# Altium PCB CarrierBoard.PcbDoc (part 2 of 2)
Units mm, origin at the board's own origin, x right, y up, seen from the top; angles counter-clockwise.
Board outline 96.12 x 102.87 mm, 2 copper layers (Top Layer, Bottom Layer), stack 1.6 mm thick; 58 components, 54 nets, 251 pads, 78 vias.
Unrouted connection lines stored in the file: 2.
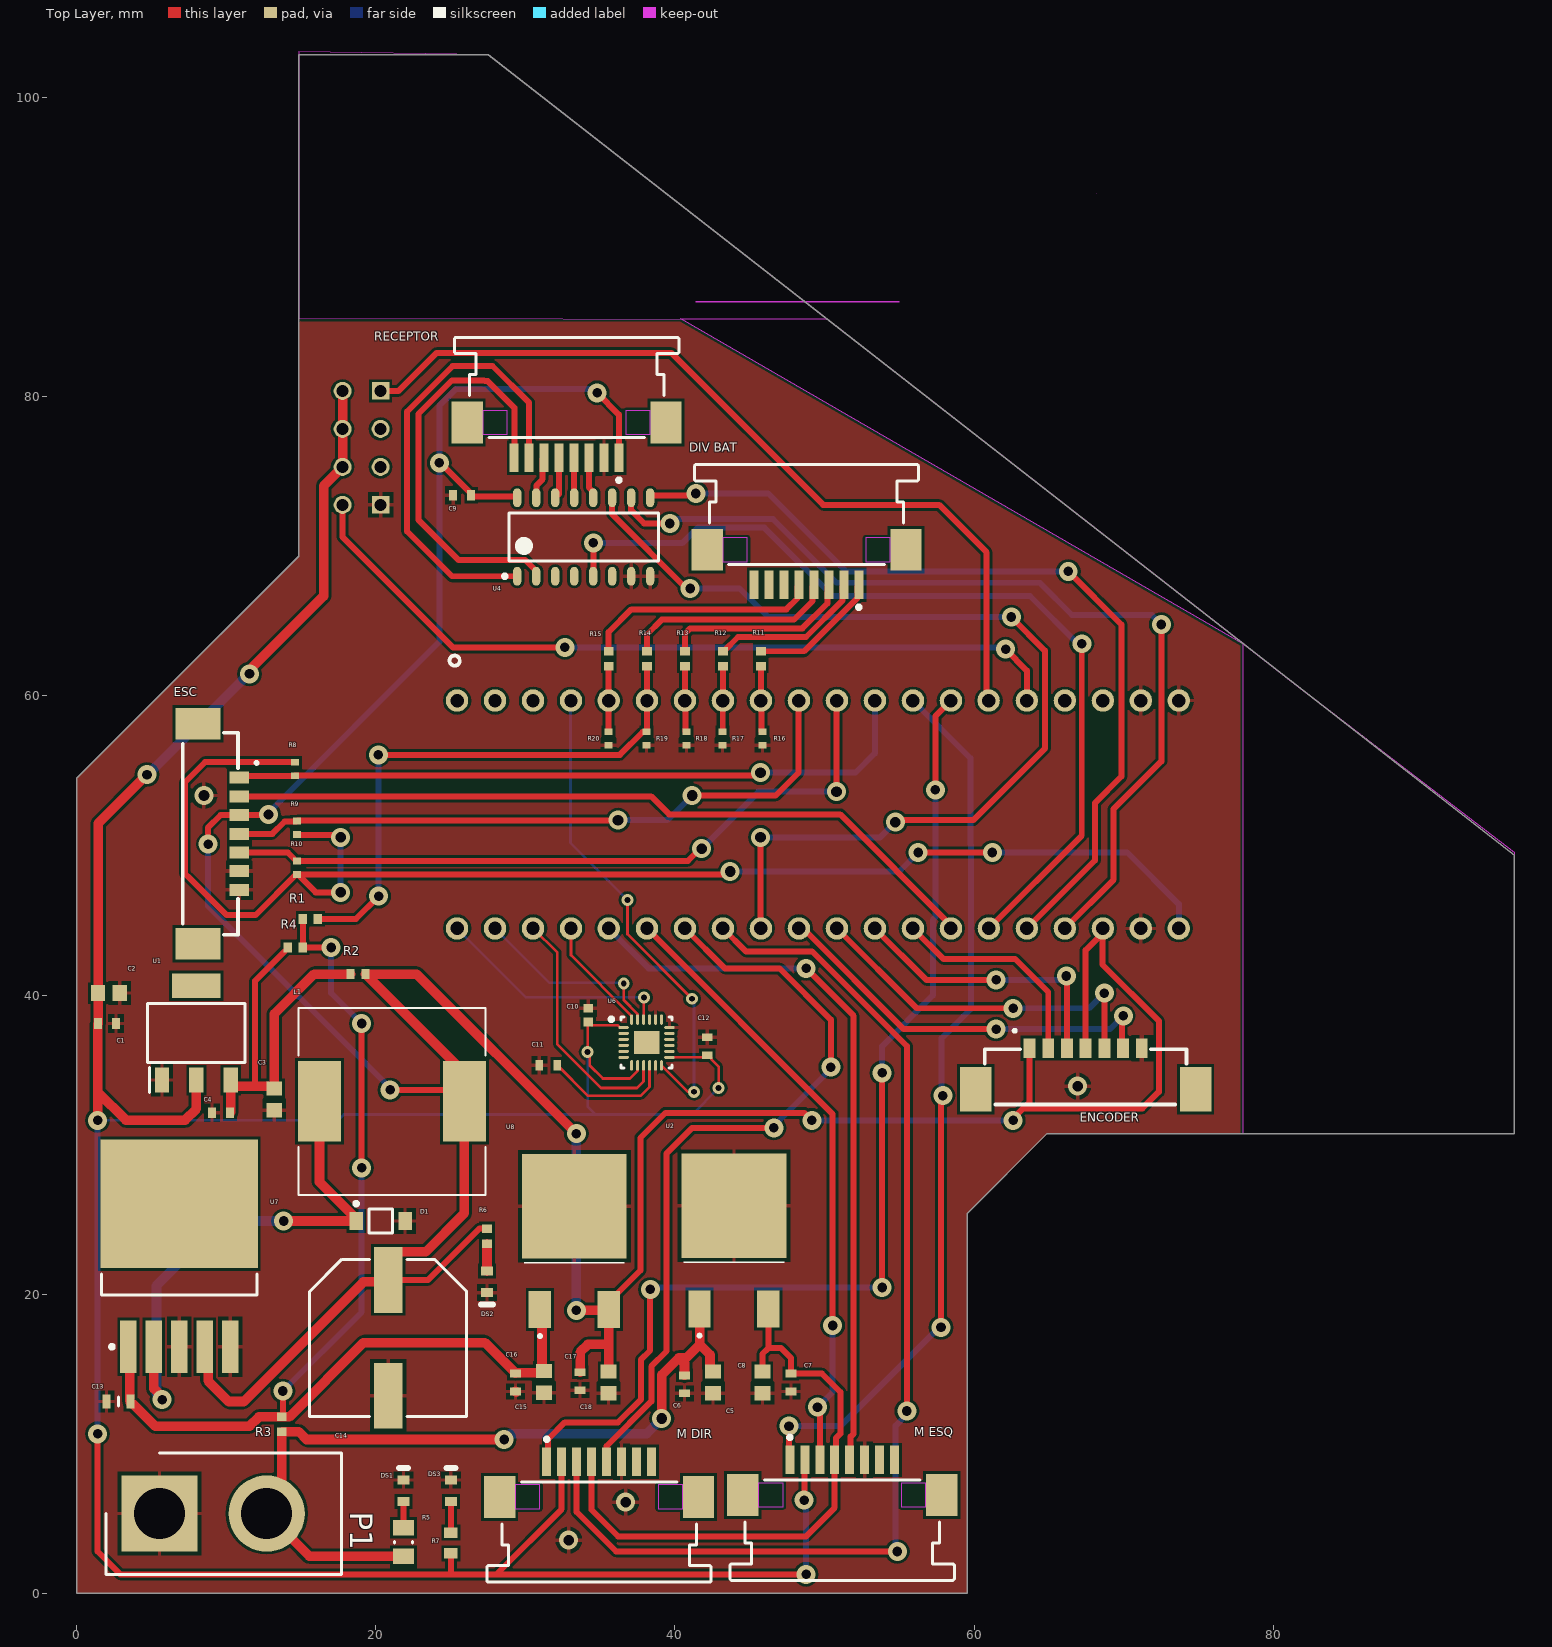
[diagram p0: Top Layer view]

## Via types
v1: diameter 1.27, hole 0.642, Top Layer to Bottom Layer, 56 vias
v2: diameter 1.27, hole 0.711, Top Layer to Bottom Layer, 15 vias
v3: diameter 0.8, hole 0.4, Top Layer to Bottom Layer, 6 vias
v4: diameter 0.8, hole 0.374, Top Layer to Bottom Layer, 1 vias

## Nets (pads, with @x,y where several pads share a name; then routed paths per layer and width w, separated by ;. In a path a pad name is that pad's centre, name@x,y a point inside that pad or via, vN(x,y) a via of type N, cw(c..) or ccw(c..) an arc to the next point about the centre after c; other vN are vias at no path point) (continued)
NetJ6_5: (continued)
  Top Layer w0.4: R15.2 35.569,64.271 37.084,65.786 47.441,65.786 48.195,66.54 48.195,67.324 48.295,67.424
SMUX0: U3.25 U4.9 | length 58.2
  Top Layer w0.4: U4.9 38.342,73.322 38.411,73.391 41.26,73.391 v1(41.402,73.533) ; U3.25 68.072,48.993 68.072,52.832 69.85,54.61 69.85,64.77 v1(66.294,68.326)
  Bottom Layer w0.4: v1(41.402,73.533) 46.228,73.533 51.435,68.326 v1(66.294,68.326)
SMUX1: U3.24 U4.10 | length 62.7
  Top Layer w0.4: U4.10 37.072,72.402 37.945,71.529 v1(39.652,71.529) ; U3.24 69.335,47.716 69.335,52.444 72.517,55.626 v1(72.517,64.77)
  Bottom Layer w0.4: v1(39.652,71.529) 39.948,71.825 46.539,71.825 50.8,67.564 64.389,67.564 66.548,65.405 71.882,65.405 v1(72.517,64.77)
SMUX2: U3.32 U4.11 | length 67.9
  Top Layer w0.4: U4.11 35.802,72.148 40.767,67.183 v1(41.021,67.183) ; v2(45.72,50.546) 45.735,50.531 45.735,44.465 U3.32 ; v2(54.737,51.562) 54.864,51.689 59.944,51.689 64.733,56.478 64.733,63.029 v1(62.484,65.278)
  Bottom Layer w0.4: v1(41.021,67.183) 44.323,67.183 46.228,65.278 v1(62.484,65.278) ; v2(45.72,50.546) 53.721,50.546 v2(54.737,51.562)
SPI_CS: U3.40 U6.22 | length 16.1
  Top Layer w0.178: U3.40 U3.40@25.605,44.45 ; U6.22 37.921,38.383 v3(37.921,39.826)
  Bottom Layer w0.178: U3.40 30.033,39.847 37.901,39.847 v3(37.921,39.826)
SPI_MISO: U3.38 U6.9 | length 16.7
  Top Layer w0.178: U3.38 32.131,42.828 32.131,36.703 35.052,33.782 37.465,33.782 37.9,34.217 U6.9
SPI_MOSI: U3.37 U6.24 | length 7.8
  Top Layer w0.178: U3.37 33.049,42.663 37.1,38.612 U6.24
SPI_SCK: U3.39 U6.23 | length 12.9
  Top Layer w0.178: v3(36.576,40.767) 36.576,39.655 37.496,38.735 37.496,38.366 U6.23
  Bottom Layer w0.178: U3.39 31.589,40.831 36.512,40.831 v3(36.576,40.767)
T_ARMA: ESC.1 R8.1 U3.12 | length 47
  Top Layer w0.4: ESC.1@11.113,54.531 ESC.1 10.975,54.643 14.58,54.643 R8.1 45.143,54.668 45.339,54.864 v2(45.72,54.864)
  Bottom Layer w0.4: v2(45.72,54.864) 52.07,54.864 53.369,56.163 U3.12
T_DIR: ESC.5 R10.1 U3.11 | length 48.2
  Top Layer w0.4: ESC.5 14.115,49.531 14.682,48.964 R10.1 40.857,48.964 41.677,49.784 v2(41.783,49.784) ; v2(50.8,53.594) 50.815,53.609 50.815,59.675 U3.11
  Bottom Layer w0.4: v2(41.783,49.784) 45.593,53.594 v2(50.8,53.594)
T_ESQ: ESC.4 R9.2 U3.10 | length 43.9
  Top Layer w0.4: ESC.4 13.078,50.781 13.903,51.606 14.707,51.606 R9.2 14.757,51.656 36.162,51.656 v2(36.195,51.689) ; v2(41.148,53.34) 46.736,53.34 48.26,54.864 48.26,59.661 U3.10
  Bottom Layer w0.4: v2(36.195,51.689) 39.497,51.689 v2(41.148,53.34)
UART_RX: U3.15 U5.RX | length 57.3
  Top Layer w0.4: U5.RX 21.527,80.391 24.066,82.931 39.751,82.931 49.911,72.771 57.658,72.771 60.833,69.596 60.833,59.826 U3.15 U3.15@60.706,59.69
UART_TX: U3.16 U5.TX | length 53.6
  Top Layer w0.4: U5.TX 17.78,70.612 25.146,63.246 v1(32.639,63.246) ; v1(62.103,63.119) 63.529,61.693 U3.16
  Bottom Layer w0.4: v1(32.639,63.246) 61.976,63.246 v1(62.103,63.119)
VBAT: C5.2 C6.2 P1.2 R3.1 R5.2 U2.1 | length 54.7
  Top Layer w0.642: R5.2 15.555,2.479 P1.2 12.7,6.54 13.716,7.556 R3.1 14.851,10.803 15.367,10.287 v1(28.575,10.287) ; v2(39.116,11.684) 39.116,14.605 40.259,15.748 ; C6.2 40.64,15.367 40.259,15.748 ; U2.1 41.656,18.994 41.656,16.637 ; C5.2 42.495,14.822 42.341,14.976 42.341,15.952 41.656,16.637 ; 40.259,15.748 40.767,15.748 41.656,16.637
  Bottom Layer w0.254: P1.2@12.637,5.271 P1.2
  Bottom Layer w0.642: v1(28.575,10.287) 28.956,10.668 38.1,10.668 v2(39.116,11.684)
pads on no net: "DIV BAT.6" "DIV BAT.7" "DIV BAT.8" "DIV BAT.MP1" "DIV BAT.MP2" "M DIR.7" "M DIR.8" "M DIR.MP1" "M DIR.MP2" "M ESQ.7" "M ESQ.8" "M ESQ.MP1" "M ESQ.MP2" ENCODER.8 ENCODER.9 ESC.8 ESC.9 RECEPTOR.MP1 RECEPTOR.MP2 U1.4 U3.1 U3.2 U3.3 U3.17, U3.18 U4.3 U4.4 U4.6 U5.GPIO0 U5.GPIO2 U6.2 U6.3 U6.4 U6.5 U6.6 U6.7 U6.14 U6.15 U6.16 U6.17 U6.19 U6.21 U6.25 U7.6

## Polygon pours and split planes (outlines as drawn)
0 on Top Layer "Top Layer-GND" (solid, remove dead copper, pour order 5): 0,54.501 0,0 59.545,0 59.545,25.4 64.879,30.734 96.121,30.734 96.121,49.342 27.519,102.87 14.841,102.87 14.841,69.342 4.3,58.801
no net on Top Layer "Top Layer-No Net" (solid, pour order 28): 3.175,65.278
0 on Bottom Layer "Bottom Layer-GND" (solid, remove dead copper, pour order 29): 0,54.501 0,0 59.545,0 59.545,25.4 64.879,30.734 96.121,30.734 96.121,49.342 27.519,102.87 14.841,102.87 14.841,69.342 4.3,58.801

## Silkscreen, mask and mechanical layers (free items; w line width, h text height)
Top Overlay:
  lines w0.254: 25.581,62.505 ccw(c25.273,62.357) 25.615,62.371

## Text inside footprints (layer, text, board x,y; h text height)
U3: Mechanical 29 "BLUE PILL" at 32.922,58.674 h0.51 r180